# Altium PCB DAP-PCB-REV-2.PcbDoc (part 4 of 4)
Units mil, origin at the board's own origin, x right, y up, seen from the top; angles counter-clockwise.
Board outline 2165.35 x 2165.35 mil, 6 copper layers (Top Layer (Sig), L2 (GND), L3 (Sig), L4 (Sig), L5 (GND), Bottom Layer (Sig)), stack 34.252 mil thick; 270 components, 172 nets, 891 pads, 299 vias.
Unrouted connection lines stored in the file: 138.
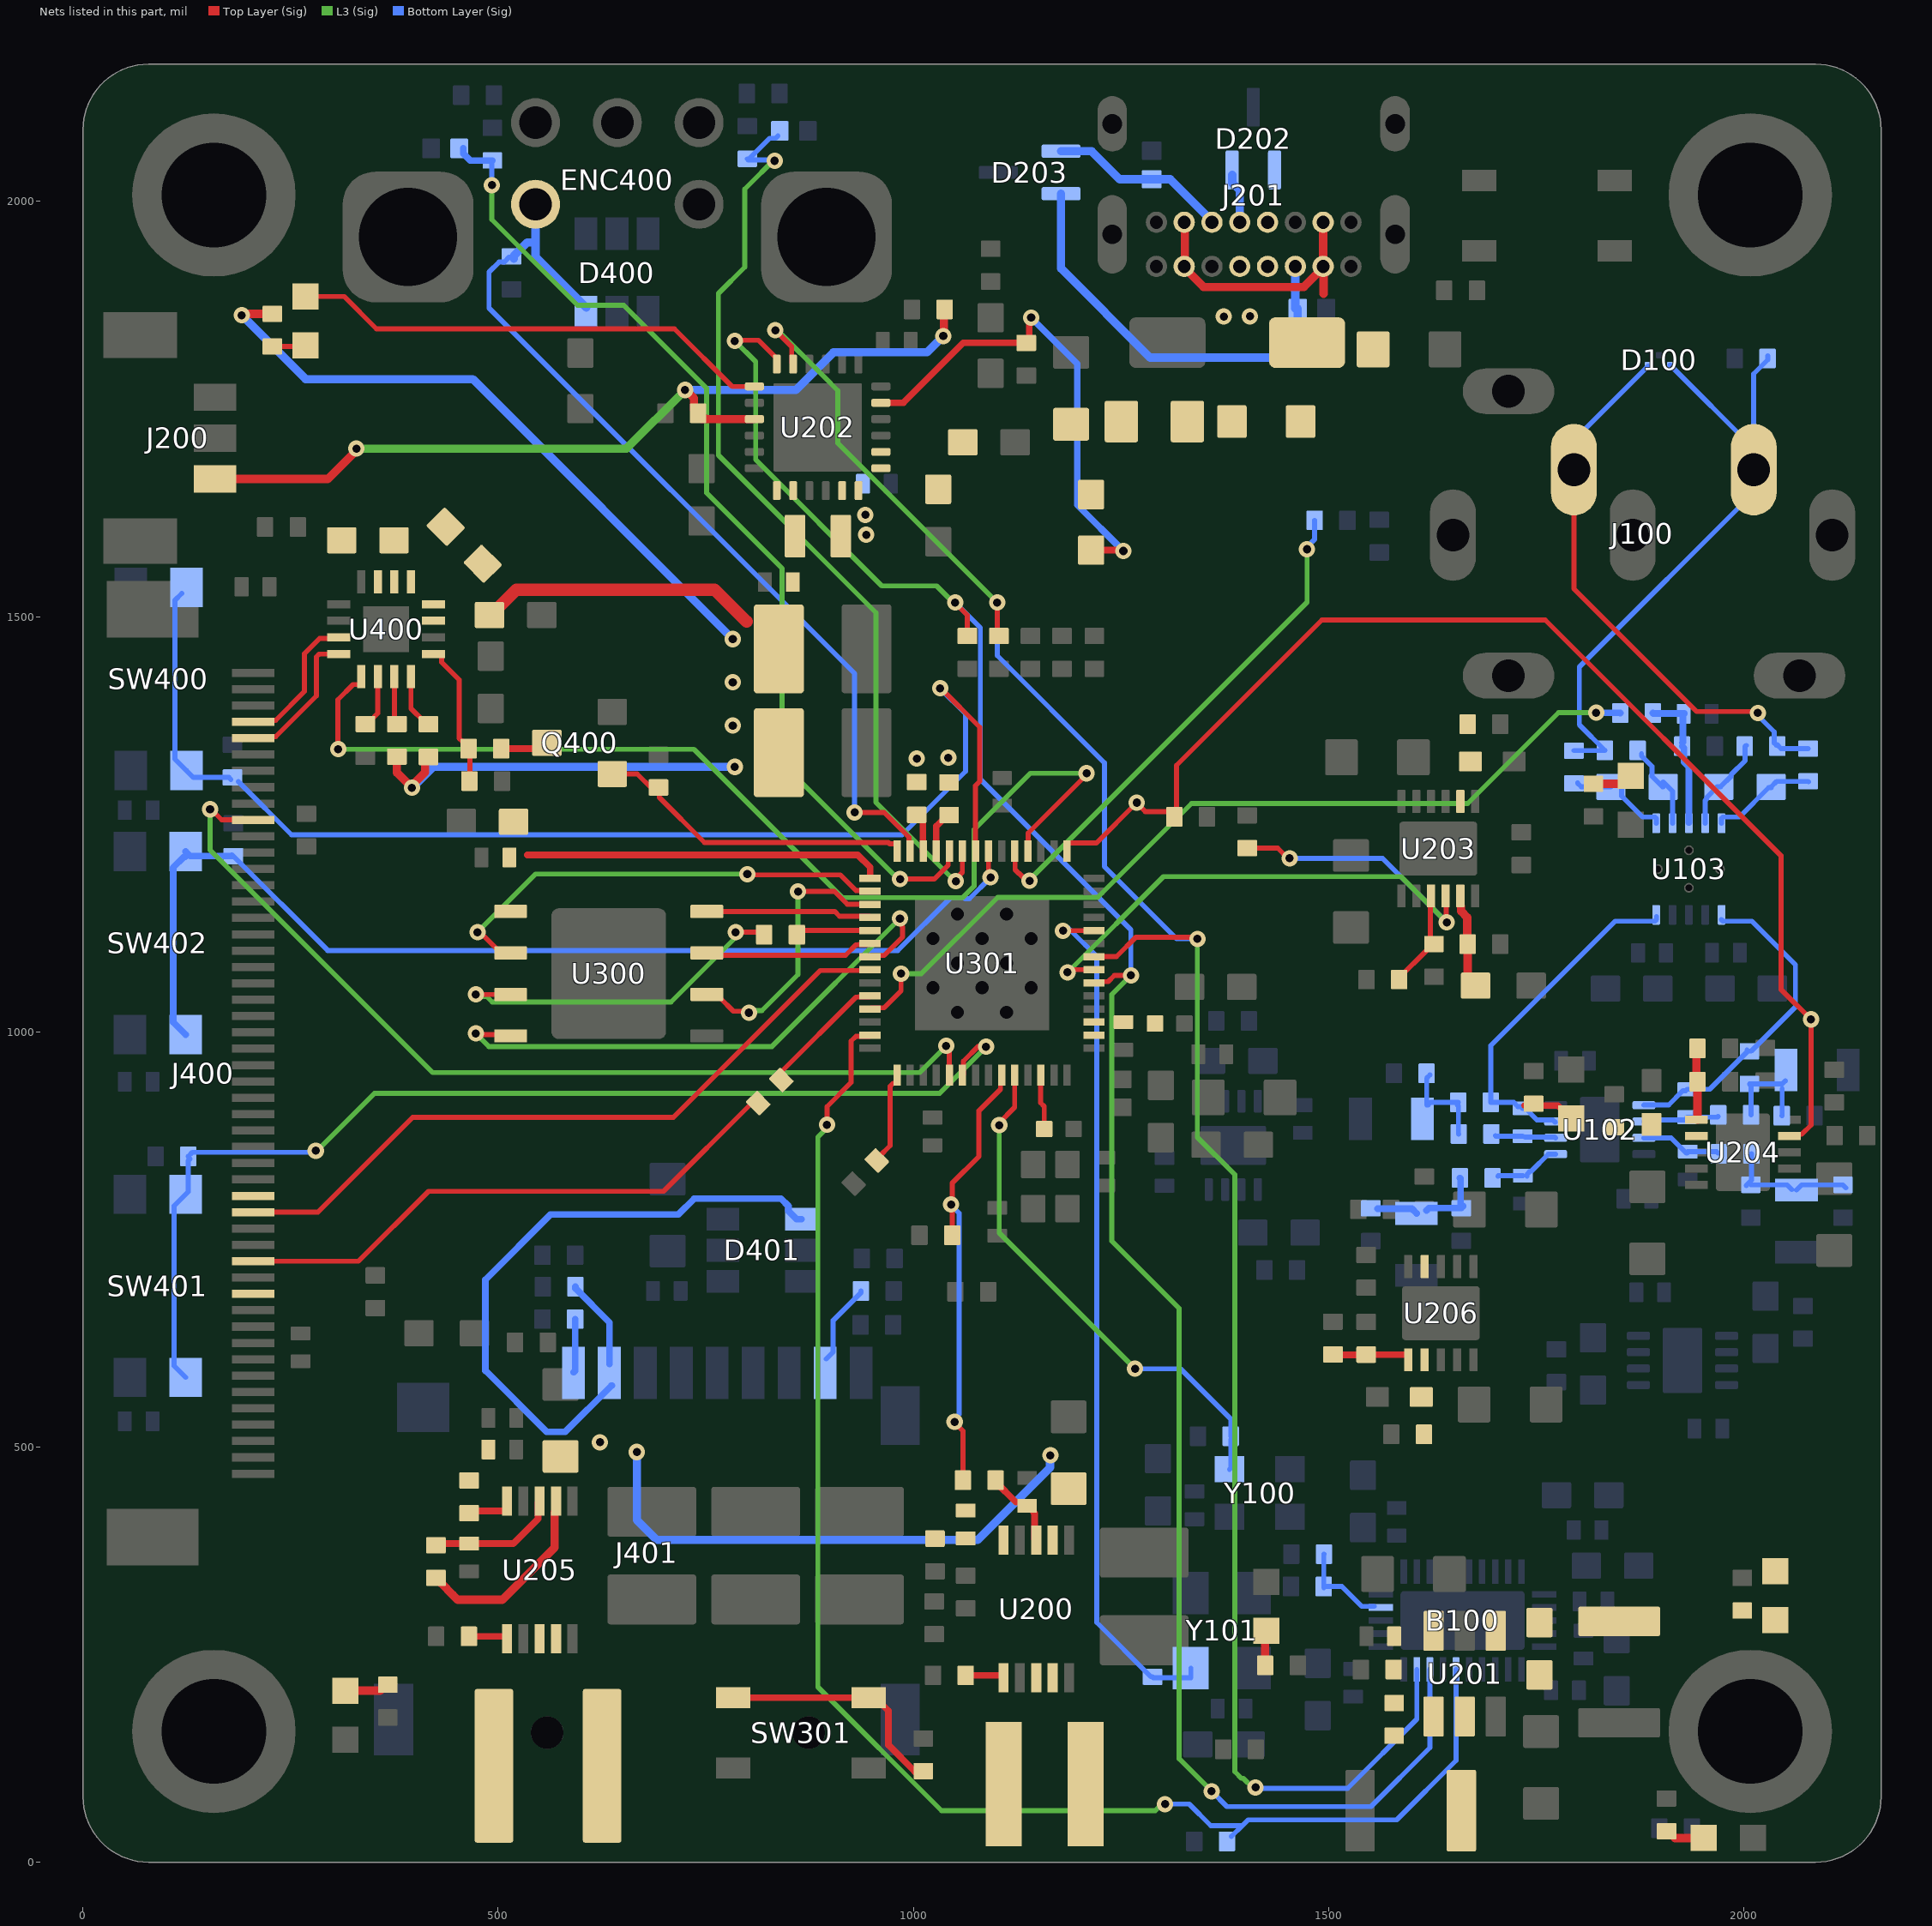
[diagram p7: the nets of this part, all layers, seen from the top]

## Via types
v1: diameter 19.68, hole 9.84, Top Layer (Sig) to Bottom Layer (Sig), tented both sides, 287 vias
v2: diameter 49.21, hole 29.53, Top Layer (Sig) to Bottom Layer (Sig), 6 vias
v3: diameter 15.75/15.75/15.75/15.75/15.75/15.75 (per signal layer), hole 7.87, Top Layer (Sig) to Bottom Layer (Sig), tented both sides, 5 vias
v4: diameter 23.62, hole 11.81, Top Layer (Sig) to Bottom Layer (Sig), tented both sides, 1 vias

## Nets (pads, with @x,y where several pads share a name; then routed paths per layer and width w, separated by ;. In a path a pad name is that pad's centre, name@x,y a point inside that pad or via, vN(x,y) a via of type N, cw(c..) or ccw(c..) an arc to the next point about the centre after c; other vN are vias at no path point) (continued)
LED3: J400.4 U400.15 | length 156.3
  Top Layer (Sig) w6: J400.4@221,1372 224.27,1375.27 231.89,1375.27 266.59,1409.97 266.59,1455.46 285,1473.87 306.87,1473.87 U400.15@308,1475
LED4: J400.5 U400.16 | length 151.8
  Top Layer (Sig) w6: J400.5@225,1355 225.58,1355.58 231.89,1355.58 281,1404.69 281,1451.49 284.51,1455 U400.16@308,1455
LEFT_EAR: C138.1 R127.1 U103.7 | length 105.8
  Bottom Layer (Sig) w5.98: R127.1@1877,1335 1877,1332.25 1889.53,1319.72 1889.53,1307.76 1902.28,1295 C138.1@1903.03,1295 ; C138.1@1903,1301 1914.25,1289.75 U103.7@1914.25,1251.12
MISO_LCD: J400.33
MOSI_LCD: J400.34 U301.36 | length 854.8
  Top Layer (Sig) w6: J400.34@205,782.8 282.8,782.8 397,897 711,897 887.8,1073.8 938.37,1073.8 U301.36@939,1074.43
NetC118_2: C118.2 R122.2 U102.2 | length 91
  Bottom Layer (Sig) w5.98: U102.2@1879.76,892 1881.69,893.93 1931.07,893.93 C118.2@1932,893 ; C118.2@1931.76,897.27 1968.27,897.27 R122.2@1969,898
NetC123_2: C123.2 R120.2 U102.6 | length 70.2
  Bottom Layer (Sig) w5.98: R120.2@1701,875 1701.73,874.27 C123.2@1733.76,874.27 ; C123.2@1736.71,873.29 1772.48,873.29 U102.6@1773.46,872.31
NetC124_2: C124.2 R117.1 U103.10 | length 128.9
  Bottom Layer (Sig) w5.98: U103.10@1973.31,1251.12 1973.31,1257.02 1975.04,1258.76 1994.82,1258.76 2030.06,1294 C124.2@2033.03,1294 ; C124.2@2033.03,1295 2039.66,1301.63 2077.37,1301.63 R117.1@2078,1301
NetC127_2: C127.2 R115.1 R116.2 R120.1 | length 110.6
  Bottom Layer (Sig) w5.98: C127.2@1618.13,912 1618.13,944.13 R116.2@1622,948 ; C127.2@1620,912 1623,915 R115.1@1656.07,915 ; R115.1@1655,912 1656.41,910.59 1656.41,877.34 R120.1@1656.76,877
NetC130_2: C130.2 R114.1 R121.2 R122.1 | length 116.8
  Bottom Layer (Sig) w5.98: R114.1@2007,937 2008.68,935.32 R122.1@2008.68,900 R122.1@2008.68,901.97 ; R114.1@2007,937.32 2046.32,937.32 C130.2@2050,941 ; R121.2@2046,899 2046.17,899.17 C130.2@2046.17,931.54
NetC131_2: C131.2 R123.2 R124.1 R126.2 | length 127.9
  Bottom Layer (Sig) w7.99: R123.2@1559,787 1600.35,787 C131.2@1605.95,781.4 ; C131.2@1618,785 1620.68,787.68 R126.2@1659.95,787.68 ; R124.1@1658.26,824 1659.1,823.16 1659.1,792.9 R126.2@1662,790
NetC132_1: C132.1 R124.2 U102.5 | length 77.3
  Bottom Layer (Sig) w5.98: R124.2@1704,826 1704,826.25 1704.48,826.73 C132.1@1733.95,826.73 ; C132.1@1739,826 1739,828.34 1742.76,832.11 1744.08,832.11 1764.6,852.63 U102.5@1773.46,852.63
NetC133_2: C133.2 R108.2 R128.2 U103.8 | length 169.1
  Bottom Layer (Sig) w7.99: R128.2@1890.68,1384 1891.18,1383.5 C133.2@1928.5,1383.5 ; R108.2@1925.85,1344 1928.12,1341.73 1928.12,1324.88 1933.94,1319.06 U103.8@1933.94,1252.06 ; R108.2@1926,1348 1926.83,1348.83 1926.83,1382.02 C133.2@1927.8,1383
NetC136_2: C136.2 R131.2 R132.1 R133.2 | length 155.9
  Bottom Layer (Sig) w5.98: R133.2@2003,815 2009.25,821.25 R132.1@2009.25,853 ; R133.2@2008.57,815.68 2052.32,815.68 C136.2@2058,810 ; C136.2@2063.57,809.4 2069.85,815.68 2119.32,815.68 R131.2@2123,812
NetC137_1: C137.1 R132.2 U102.3 | length 97
  Bottom Layer (Sig) w5.98: U102.3@1879.76,872.31 1912.54,872.31 1930.85,854 C137.1@1932,854 ; C137.1@1932.57,855.73 1967.27,855.73 R132.2@1969,854
NetC138_2: C138.2 R134.1 U103.6 | length 109.1
  Bottom Layer (Sig) w5.98: R134.1@1800,1300 1800,1299.35 1804.35,1295 C138.2@1840.04,1295 ; C138.2@1853,1292 1853,1284.01 1878.25,1258.76 1892.83,1258.76 1894.57,1257.02 U103.6@1894.57,1251.12
NetC201_1: C201.1 L202.1 U201.5
NetC201_2: C201.2 L201.2 U201.1
NetC205_1: C205.1 R201.1 R204.2 U201.3
NetC212_1: C212.1 R213.1
NetC219_2: C219.2 D201.A FB200.1 J201.A4 J201.A9 J201.B4 J201.B9 | length 331
  Top Layer (Sig) w10: J201.A9@1326.14,1920.25 1349.34,1897.06 1470.27,1897.06 1493.46,1920.25 J201.A4@1493.46,1921.85 ; J201.B4@1326.14,1975 1327,1975 J201.A9@1327,1919 ; J201.B9@1493,1974 1493.46,1974 J201.A4@1493.46,1921.85 ; 1494,1889 1494,1921.85 J201.A4@1493.46,1921.85
NetC221_2: C221.2 R227.1
NetC223_1: C223.1 R233.2 U204.7
NetC226_2: C226.2 R238.2
NetC233_1: C233.1 R248.2 U206.7
NetC302_2: C302.2 L300.1 U301.2 U301.3
NetC404_2: C404.2 R400.2 U301.23 | length 1141.1
  Top Layer (Sig) w6: v1(1051,1181.42) 1051,1183.93 1059.06,1191.99 U301.23@1059.06,1217.52
  L3 (Sig) w6: v1@835.85,2053.85 797,2015 797,1921 765.16,1889.16 765.16,1694.46 954.84,1504.77 954.84,1276.39 1049.81,1181.42 v1(1051,1181.42)
  Bottom Layer (Sig) w6: R400.2@800,2051.32 801.16,2050.16 830.84,2050.16 v1@833,2048 ; R400.2@801.97,2051.32 826.84,2076.19 834.19,2076.19 C404.2@837,2079
  other v1: 833,2049
NetC405_2: C405.2 R408.1 U301.24 | length 1232.3
  Top Layer (Sig) w6: v1(984,1184) 1025.31,1184 1041.98,1200.67 1041.98,1216.19 U301.24@1043.31,1217.52
  L3 (Sig) w6: v1@492.34,2021.66 492.34,1978.32 595.63,1875.03 651.03,1875.03 751,1775.06 751,1649 842,1558 842,1323.42 981.42,1184 v1(984,1184)
  Bottom Layer (Sig) w6: v1(492.34,2019.64) 492.34,2047.34 R408.1@494,2049
  Bottom Layer (Sig) w7.99: C405.2@458,2064 458,2057.82 466.5,2049.32 R408.1@493,2049.32
NetC410_1: C410.1 U400.8
NetC410_2: C410.2 U400.9
NetC411_1: C411.1 U400.11
NetC411_2: C411.2 U400.10
NetD200_A: D200.A R206.1 | length 39
  Top Layer (Sig) w6: R206.1@230,1824 231.32,1825.32 266.84,1825.32 D200.A@268,1826.47
NetD203_1: D203.1 J201.B5 R234.2 | length 218.6
  Bottom Layer (Sig) w10: D203.1@1177.8,2060.59 1214.67,2060.59 1248.38,2026.87 1309.33,2026.87 1356.21,1980 J201.B5@1363,1980
NetD203_2: D203.2 J201.A5 R235.2 | length 511.8
  Bottom Layer (Sig) w10: D203.2@1177.8,2009.41 1177.8,1919.2 1285,1812 1431.91,1812 1462.87,1842.96 R235.2@1462.87,1871 ; R235.2@1460,1871 1460,1918 J201.A5@1463,1921
NetD204_A: D204.A R242.1
NetD204_C: D204.C U206.4
NetD205_C: D205.C R249.1 | length 40.2
  Top Layer (Sig) w10: R249.1@1423.63,237 1423.63,276.63 D205.C@1424,277
NetD206_A: D206.A R250.1 | length 46.3
  Top Layer (Sig) w10: R250.1@1909,37 1909.28,37 1917.28,29 D206.A@1952,29
NetD207_A: D207.A R251.1 | length 61.4
  Top Layer (Sig) w7.99: R251.1@1736,911.32 1776.16,911.32 1788,899.47 D207.A@1788,895
NetD208_C: D208.C R252.1 | length 45.5
  Top Layer (Sig) w10: R252.1@1819,1298.69 1853.25,1298.69 1858,1303.43 D208.C@1858,1308
NetD209_A: D209.A R253.1 | length 54.3
  Top Layer (Sig) w10: D209.A@316,206.53 357.87,206.53 365,213.65 R253.1@365,216
NetD401_1: D401.1 J401.2 R416.1 | length 860.5
  Bottom Layer (Sig) w7.99: R416.1@593,693 593,691.03 634,650.03 J401.2@634,600 ; J401.2@637,574 636.45,574 580.61,518.16 558.37,518.16 484.63,591.9 484.63,701.63 562.99,780 716.89,780 736.07,799.18 840.47,799.18 849.56,790.09 849.56,784.19 859.34,774.4 D401.1@865.24,774.4
NetJ401_1: J401.1 R417.1 | length 64.7
  Bottom Layer (Sig) w8: J401.1@591,590 592.69,591.68 R417.1@592.69,654
NetJ401_8: J401.8 R418.1 | length 99.4
  Bottom Layer (Sig) w6: J401.8@895,606 903.43,614.43 903.43,652.46 937,686.03 R418.1@937,688
NetQ400_1: Q400.1 R425.2 U301.28 | length 397.1
  Top Layer (Sig) w6: Q400.1@637.37,1310.6 667.4,1310.6 685.84,1292.16 687.19,1292.16 R425.2@694,1285.35 ; R425.2@693,1294.32 694,1293.32 694,1282.37 748.37,1228 969.83,1228 971.39,1226.45 978.98,1226.45 980.32,1225.12 U301.28@980.32,1217.52
NetQ400_3: Q400.3 R423.1 | length 55.3
  Top Layer (Sig) w8: R423.1@503.69,1341 553,1341 Q400.3@553,1347
NetR119_1: R119.1 U301.19 | length 616
  Top Layer (Sig) w6: U301.19@1122.05,1217.52 1122.47,1217.09 1122.47,1195.21 1126.72,1190.96 1127.18,1190.96 1136.3,1181.84 v1(1140,1181.84)
  L3 (Sig) w6: v1(1140,1181.84) 1140,1183.23 1474.09,1517.32 v1@1474.09,1580.91
  Bottom Layer (Sig) w6: v1@1476,1586 1483.32,1593.32 R119.1@1483.32,1616
  other v1: 1474.09,1581.19
NetR128_1: R128.1 U301.39 | length 1060.5
  Top Layer (Sig) w6: U301.39@947.83,1027.56 949.17,1028.89 964.69,1028.89 985.13,1049.33 v1(985.13,1070)
  L3 (Sig) w6: v1(985.13,1070) 1009.48,1070 1101.48,1162 1222,1162 1335,1275 1667.56,1275 1776.94,1384.38 v1@1823.62,1384.38
  Bottom Layer (Sig) w7.99: v1@1827,1385 1827,1384.85 1827.66,1384.19 1851.12,1384.19 R128.1@1851.32,1384
  other v1: 1822.25,1384.38
NetR203_1: R203.1 R308.2 U301.51 | length 555.2
  Top Layer (Sig) w6: R308.2@1043,761 1043.87,761 1046.69,763.81 1046.69,817.7 1079,850.01 1079,905.02 1104.88,930.9 1104.88,934.52 1104.97,934.61 1104.97,946.5 U301.51@1106.3,947.83 ; v1@1049,530 1059.63,519.37 R203.1@1059.63,460
  Bottom Layer (Sig) w6: v1(1045.42,792.03) 1045.42,791.26 1055,781.67 1055,539.38 1052.3,536.68 1052.3,533.7 v1@1055,531
  other v1: 1049.68,530.36
NetR204_1: R204.1 U201.4
NetR207_2: R207.2 U200.1 | length 48
  Top Layer (Sig) w8: R207.2@1063,225 1109,225 U200.1@1109,223
NetR219_1: R219.1 R226.2 U203.3 | length 116.3
  Top Layer (Sig) w6: R219.1@1585,1063 1585,1064.97 1618.19,1098.16 1618.19,1098.84 1622.35,1103 R226.2@1626,1103 ; R226.2@1623,1107 1622.52,1107.48 1622.52,1162.88 U203.3@1623.29,1163.65
NetR220_1: R220.1 R224.2 U203.5 | length 100.7
  Top Layer (Sig) w10: U203.5@1658.8,1154.87 1658.8,1152.18 1659.52,1151.46 1659.52,1145.25 1667,1137.77 R224.2@1667,1105.56 ; R224.2@1667.47,1105.56 1667.47,1066.31 1672.77,1061 R220.1@1674,1061
NetR222_1: R222.1 R228.2 U204.6 | length 87.1
  Top Layer (Sig) w10: U204.6@1942.9,894.37 1944.24,894.37 1944.32,894.45 R228.2@1944.32,940 ; R228.2@1942.9,940 1942.9,979 R222.1@1944,979
NetR223_1: R223.1 U204.4 U301.15 | length 1517.4
  Top Layer (Sig) w6: U301.15@1185.04,1217.52 1185.04,1225.98 1186.37,1227.32 1220.32,1227.32 v1(1269,1276) 1269,1275.51 1279.36,1265.15 1308.17,1265.15 R223.1@1314.32,1259 ; R223.1@1317,1258 1317,1321 1492,1496 1761,1496 2044.84,1212.16 2044.84,1051.16 v1(2081,1015) 2081,887.77 2069.84,876.61 2057.02,876.61 U204.4@2055.1,874.68
NetR238_1: R238.1 U205.10 | length 58.6
  Top Layer (Sig) w8: R238.1@464,423 510.63,423 U205.10@510.63,434.95
NetR239_2: R239.2 U205.1 | length 48.3
  Top Layer (Sig) w8: R239.2@464.69,272 512,272 U205.1@512,271
NetR243_1: R243.1 R245.2 U206.6 | length 93.5
  Top Layer (Sig) w7.99: R243.1@1508,611 R245.2@1545.32,611 ; R245.2@1545.32,611.21 1595.03,611.21 1595.95,610.29 U206.6@1595.95,605.11
NetR302_2: R302.2 SW301.1 SW301.2 | length 274.9
  Top Layer (Sig) w7.99: SW301.1@783,198 SW301.2@949,198 ; SW301.2@958.26,194 970,182.26 970,141 1001.19,109.81 1001.19,109.53 1005.72,105 R302.2@1006,105
NetR303_2: R303.2 U301.38 | length 154.9
  Top Layer (Sig) w6: R303.2@840.92,941.92 840.76,942.08 840.76,951.75 930.9,1041.89 934.52,1041.89 934.61,1041.98 946.5,1041.98 U301.38@947.83,1043.31
NetR304_1: R304.1 U301.25 | length 52
  Top Layer (Sig) w8: U301.25@1027.56,1217.52 1027.56,1247.53 1035.19,1255.16 1041.03,1261 R304.1@1044,1261
NetR305_2: R305.2 U301.43 | length 109
  Top Layer (Sig) w6: R305.2@958.76,849.76 972,863 972,934.52 975.51,938.04 978.98,938.04 980.32,939.37 U301.43@980.32,947.83
NetR306_1: R306.1 U301.26 | length 42.6
  Top Layer (Sig) w8: R306.1@1009,1259 1011.48,1256.52 1011.48,1217.85 U301.26@1011.81,1217.52
NetR420_2: R420.2 U400.3 | length 56.7
  Top Layer (Sig) w6: U400.3@375,1428 375,1377 R420.2@379,1373
NetR421_2: R421.2 U400.4 | length 66
  Top Layer (Sig) w6: U400.4@395,1428 395,1389.4 410.4,1374 R421.2@416,1374
NetR422_2: R422.2 U400.2 | length 62.1
  Top Layer (Sig) w6: R422.2@345,1370 345,1373.72 355,1383.72 U400.2@355,1428
NetR423_2: R423.2 R424.2 U400.5 | length 166.3
  Top Layer (Sig) w6: U400.5@422,1455 429.9,1455 431.82,1453.08 431.82,1445.18 453,1424 453,1353.33 456.51,1349.81 457.47,1349.81 464.32,1342.97 R423.2@464.32,1341 ; R424.2@466,1301.37 R423.2@466,1331
NetU301_18: U301.18 U400.1 | length 1302.9
  Top Layer (Sig) w6: v1@307,1343.56 307,1400 325.18,1418.18 333.08,1418.18 335,1420.1 U400.1@335,1428 ; U301.18@1137.8,1217.52 1138.32,1218.04 1138.32,1239.32 1210,1311 v1@1210,1313
  L3 (Sig) w6: v1@308,1341 308.63,1340.37 735.63,1340.37 914.43,1161.57 1059.22,1161.57 1073.16,1175.51 1073.16,1243.73 1140.83,1311.4 v1(1208.48,1311.4)
  other v1: 307.21,1340.37
PG_LDO-: R241.1 U203.4 U301.7 | length 870.6
  Top Layer (Sig) w6: v1@1186,1071 1189.8,1074.8 U301.7@1217.52,1074.8 ; R241.1@1402,1221 1402.32,1221.32 1438.67,1221.32 1450.98,1209 v1(1453,1209) ; U203.4@1641.01,1163.65 1641.68,1162.98 1641.68,1132.41 v1(1642.36,1131.74)
  L3 (Sig) w6: v1(1185.65,1071.55) 1301.1,1187 1587.1,1187 v1(1642.36,1131.74)
  Bottom Layer (Sig) w6: v1(1453,1209) 1565.1,1209 v1(1642.36,1131.74)
PMID_BQ: C200.2 U202.20
POWER: R401.2 SW401.1 SW401.3 U301.48 | length 1336
  Top Layer (Sig) w6: U301.48@1059.06,947.83 1060.39,949.17 1060.39,964.69 1078.7,983 v1@1084,983
  L3 (Sig) w6: v1@280.21,855.21 351,926 1031.55,926 v1(1087.59,982.04)
  Bottom Layer (Sig) w6: SW401.3@123.46,583.76 109.53,597.7 109.53,790.3 SW401.1@123.46,804.24 126.69,807.46 126.69,844.68 R401.2@129,847 ; R401.2@126.69,850 131.69,855 v1@275,855
  other v1: 280.28,856.87
RESET: J400.10 U301.47 | length 1149
  Top Layer (Sig) w6: v1(153,1268) 154.12,1268 166.88,1255.24 J400.10@205,1255.24 ; U301.47@1043.31,947.83 v1@1043.31,979.69
  L3 (Sig) w6: v1(153,1268) 153,1219 421,951 1007.55,951 v1(1039.59,983.04)
RESETB_DAC: B100.21 R111.2 U301.41 | length 1824.9
  Top Layer (Sig) w6: v1(896,888) 896,910 925.04,939.04 925.04,988.79 930.9,994.65 934.52,994.65 934.61,994.73 946.5,994.73 U301.41@947.83,996.06
  L3 (Sig) w5.98: v1(896,888) 896,884.29 885,873.29 885,211 1034,62 1291.29,62 1299.29,70 v1(1303,70)
  Bottom Layer (Sig) w5.98: v1(1303,70) 1332.17,70 1358.17,44 1396.04,44 ; R111.2@1383,30.96 1396.04,44 ; B100.21@1653.5,232 1653.5,122.5 1582,51 1403.04,51 1396.04,44
RIGHT_EAR: C124.1 R125.1 U103.9 | length 116.6
  Bottom Layer (Sig) w6: U103.9@1953.62,1251.12 1953.62,1278.58 1955.32,1280.28 1955.32,1282.25 1968.07,1295 1972.01,1295 1984.76,1307.75 1984.76,1309.72 2001.74,1326.7 2001.74,1343.74 R125.1@2003,1345
RING: D100.3 J100.3 R117.2 R125.2 | length 676.2
  Top Layer (Sig) w6: J100.3@1795.46,1677 1795.46,1533.54 1943.24,1385.76 2012.24,1385.76 v1@2016,1382
  Bottom Layer (Sig) w5.98: v1@2015,1383 2036.72,1361.28 2036.72,1347.82 R125.2@2039.27,1345.27 ; R125.2@2040,1346 2045,1341 R117.2@2077.54,1341
  Bottom Layer (Sig) w6: J100.3@1795.46,1677 1795.46,1712.46 D100.3@1885,1802
  other v1: 2017,1384
SCL_BQ: B100.23 R208.1 U202.6 U301.6 | length 2586.7
  Top Layer (Sig) w6: v1(785,1832) 786,1833 813.35,1833 835.48,1810.87 U202.6@835.48,1804.18 ; v1@1056,1511 1065,1502 R208.1@1065,1476.69 ; U301.6@1217.52,1059.06 1218.85,1060.39 1230.74,1060.39 1230.83,1060.47 1234.46,1060.47 1241.98,1068 v1(1262,1068)
  L3 (Sig) w6: v1(785,1832) 810,1807 810,1689 962,1537 1027.96,1537 1048,1516.96 v1@1048,1516 ; v1(1262,1068) 1239,1045 1239,748 1320,667 1320,124.64 v1(1359.16,85.48)
  Bottom Layer (Sig) w5.98: v1(1359.16,85.48) 1377.64,67 1551,67 1622.01,138.01 B100.23@1622.01,232
  Bottom Layer (Sig) w6: v1@1052,1515.43 1080.62,1486.8 1080.62,1304.25 1262,1122.87 v1(1262,1068)
  other v1: 1050.43,1517
SCL_LCD: J400.37 R303.1 | length 686.9
  Top Layer (Sig) w6: J400.37@205,723.74 331.74,723.74 416,808 699,808 805.08,914.08 R303.1@813.08,914.08
SDA_BQ: B100.24 R211.1 U202.5 U301.8 | length 2528.7
  Top Layer (Sig) w6: v1(833.78,1844.88) 853.44,1825.22 853.44,1805.91 U202.5@855.17,1804.18 ; v1(1101,1517) 1101,1478.69 R211.1@1103,1476.69 ; U301.8@1217.52,1090.55 1244.55,1090.55 1268,1114 1340,1114 v1(1342,1112)
  L3 (Sig) w6: v1(833.78,1844.88) 836.4,1844.88 892.1,1789.18 909,1772.28 909,1709 v1(1101,1517) ; v1(1342,1112) 1342,873 1387,828 1387,109.03 1394.93,101.1 1397.19,101.1 1408.3,90 v1(1412,90)
  Bottom Layer (Sig) w5.98: v1(1412,90) 1413.03,88.97 1522.97,88.97 1606.26,172.26 B100.24@1606.26,232
  Bottom Layer (Sig) w6: v1(1101,1517) 1101,1453 1230,1324 1230,1199 1317,1112 v1(1342,1112)
SELECT: D400.3 ENC400.5 R412.2 U301.27 | length 1151.3
  Top Layer (Sig) w6: v1(929.24,1264.24) 964.86,1264.24 994.73,1234.37 994.73,1218.85 U301.27@996.06,1217.52
  Bottom Layer (Sig) w5.98: R412.2@513.27,1933.09 507.18,1927 501,1927 489,1915 489,1871.57 929.24,1431.33 v1(929.24,1264.24) ; ENC400.5@541.45,1993.03 ENC400.5@545,1996.57
  Bottom Layer (Sig) w10: R412.2@519,1931 519,1934.72 534.83,1950.55 545,1950.55 ; ENC400.5@545,1996.57 545,1950.55 ; D400.3@606,1872 606,1872.26 545,1933.26 545,1950.55
SET_LDO-: C222.2 R232.2 U203.8
SHDN_BB_3.3: C230.2 R237.2 U205.8 | length 158.4
  Top Layer (Sig) w8: R237.2@425,381.68 427.05,383.73 518.15,383.73 548,413.57 548,432.95 U205.8@550,434.95
SHDN_BB_3.9: C213.2 R203.2 U200.8 | length 99.8
  Top Layer (Sig) w8: R203.2@1099,460 1099,458.03 1123.4,433.63 1136.08,433.63 1144.81,424.9 1144.81,421.4 1146,420.22 1146,389.96 U200.8@1148,387.95
SPI_CS0: U300.1 U301.32 | length 199.6
  Top Layer (Sig) w6: U300.1@751.22,1145 905.23,1145 911.02,1139.21 934.52,1139.21 934.61,1139.13 946.5,1139.13 U301.32@947.83,1137.8
SPI_D: U300.5 U301.35 | length 693.1
  Top Layer (Sig) w6: v1(473,998) 476.7,998 478.2,996.5 508.5,996.5 U300.5@510,995 ; U301.35@947.83,1090.55 949.17,1091.88 964.69,1091.88 987.06,1114.26 987.06,1126.18 986.45,1126.79 986.45,1136.45 v1@987.06,1137.06
  L3 (Sig) w6: v1(473,998) 488.65,982.35 829.64,982.35 984.29,1137 v1@985,1137
  other v1: 983.83,1136.54
SPI_HD: U300.7 U301.30 | length 554.8
  Top Layer (Sig) w6: v1(475,1120) 478.19,1120 503.19,1095 U300.7@509,1095 ; v1(800,1190) 801,1189 912,1189 930.84,1170.16 946.97,1170.16 U301.30@947.83,1169.29
  L3 (Sig) w6: v1(475,1120) 545,1190 v1(800,1190)
SPI_Q: U300.2 U301.34 | length 194.5
  Top Layer (Sig) w6: U300.2@759.16,1092.16 918.17,1092.16 930.9,1104.88 934.52,1104.88 934.61,1104.97 946.5,1104.97 U301.34@947.83,1106.3
SPI_WP: U300.3 U301.31 | length 318.7
  Top Layer (Sig) w6: U300.3@762,1041 767.03,1041 783.16,1024.87 800.13,1024.87 v1(802,1023) ; v1(861,1169) 905,1169 920.46,1153.54 U301.31@947.83,1153.54
  L3 (Sig) w6: v1(802,1023) 804.62,1025.62 817.62,1025.62 861,1069 v1(861,1169)
SPICLK: R307.2 U301.33 | length 90.7
  Top Layer (Sig) w6: R307.2@859.69,1115.97 865.76,1122.05 U301.33@947.83,1122.05
SPICLK_FL: R307.1 U300.6 | length 424.3
  Top Layer (Sig) w6: v1(473,1045) U300.6@507,1045 ; v1(786,1120) 815,1120 R307.1@819,1116
  L3 (Sig) w6: v1(473,1045) 475.62,1042.38 486.46,1042.38 492.84,1036 708,1036 v1@790.64,1118.64
STAT_BQ: D200.C U202.7 | length 585.4
  Top Layer (Sig) w6: D200.C@268,1885.53 314.59,1885.53 353.42,1846.7 712.3,1846.7 781.79,1777.21 U202.7@808.51,1777.21
SUMM_L: C123.1 R115.2 U102.7 U103.5 | length 419.3
  Bottom Layer (Sig) w5.98: C123.1@1732,910 1728.04,910 1723.04,915 R115.2@1695.44,915 1695.44,983.44 1845.24,1133.24 1892.83,1133.24 1895,1135.41 U103.5@1895,1139 ; C123.1@1733.76,907.73 1737.2,907.73 1751,893.93 1770.07,893.93 U102.7@1773,891
SUMM_R: C118.1 R114.2 U102.1 U103.1 | length 390.5
  Bottom Layer (Sig) w5.98: U102.1@1879.76,911.68 1880.07,912 1909.58,912 1926.58,929 C118.1@1930,929 ; C118.1@1931.76,930.73 1959.08,930.73 2004,975.65 R114.2@2004,978 ; U103.1@1973,1135.28 1975.04,1133.24 2009.76,1133.24 2062.24,1080.76 2062.24,1029.95 2008.97,976.68 R114.2@2007,976.68
SW1_BB_3.3: L204.1 U205.3
SW1_BB_3.9: L200.1 U200.3
SW2_BB_3.3: L204.2 U205.4
SW2_BB_3.9: L200.2 U200.4
SW_BQ: C207.1 L203.1 U202.17 U202.18
  other v1: 943.12,1598.69 942.12,1622.69
SYS: C203.2 C208.2 C209.2 C210.2 C224.2 C412.2 L203.2 R206.2 R237.1 R420.1 R421.1 U200.7 U202.13 U202.14 U205.7 U400.7 | length 2485.4
  Top Layer (Sig) w10: v1(191,1863) 192.69,1864.69 R206.2@228,1864.69 ; R420.1@378,1328 378,1312 v1(396,1294) 396,1296.62 412.03,1312.65 412.03,1326.16 414.87,1329 R421.1@416,1329 ; R237.1@425,342.32 426.97,342.32 431.81,337.47 431.81,335.5 445.32,322 445.32,321.86 451.17,316 505,316 568,379 568,421 569,422 569,434.27 U205.7@569.69,434.95
  Top Layer (Sig) w15: C412.2@490,1510 499.47,1510 521.72,1532.25 760.75,1532.25 799,1494
  Bottom Layer (Sig) w10: v1@191.07,1862.93 268,1786 469.44,1786 v1(782.44,1473) ; v1@398,1295 422.15,1319.15 v1(784.91,1319.15) ; v1(667,494) 667,412 691,388 1077.33,388 1164.6,475.27 1164.6,489.6 v1(1165,490)
  other v1: 622.45,505.67 782.44,1368.79 782.44,1420.89
TE: J400.39
TIP: D100.2 J100.2 R127.2 R129.2 R134.2 | length 762.8
  Bottom Layer (Sig) w6: R134.2@1795.54,1338.69 1830.68,1338.69 R127.2@1831,1339 ; R127.2@1832.85,1339 1802,1369.85 1802,1439.44 2015,1652.44 J100.2@2015,1653 ; D100.2@1911,1803 1911.48,1803 2012,1702.48 J100.2@2012,1677 2012,1792.35 2029,1809.35 R129.2@2029,1814
TRI_STATE_22: R106.2 U301.52 Y100.1 | length 629.6
  Top Layer (Sig) w6: v1(1103.37,887.6) 1103.37,890.37 1122.05,909.05 U301.52@1122.05,947.83
  L3 (Sig) w6: v1(1103.37,887.6) 1103.37,757.86 1266,595.24 v1@1266,595
  Bottom Layer (Sig) w6: v1@1267,591 1270.21,594.21 1321.79,594.21 1382.19,533.81 R106.2@1382.19,513 ; Y100.1@1380.67,473.09 1382.19,474.61 1382.19,509.19 R106.2@1384,511
  other v1: 1267.02,594.21
TRI_STATE_24: R107.2 U301.10 Y101.1 | length 1048.6
  Top Layer (Sig) w6: v1(1180.23,1121.71) 1180.4,1121.88 1217.35,1121.88 U301.10@1217.52,1122.05
  Bottom Layer (Sig) w6: v1(1180.23,1121.71) 1181.28,1122.76 v1@1188.85,1122.76 ; v1@1186.31,1125.31 v1@1188.85,1122.76 ; R107.2@1288,223.32 1286.03,223.32 1220.73,288.62 1220.73,1090.88 v1@1188.85,1122.76 ; R107.2@1289,222 1334.11,222 Y101.1@1334.11,233.72
TS: J200.3 R214.1 R215.2 U202.9 | length 1078.2
  Top Layer (Sig) w10: J200.3@159.07,1665.79 294.79,1665.79 v1@329,1700 ; v1@729.99,1769.01 735.84,1763.16 735.84,1749.84 R215.2@740.69,1745 ; R215.2@740.69,1743.03 745.53,1738.19 751.04,1738.19 751.39,1737.84 U202.9@808.51,1737.84 ; v1(1036,1838) 1036.84,1838.84 1036.84,1869.16 R214.1@1037.69,1870
  L3 (Sig) w10: v1(329.13,1702.42) 654.42,1702.42 v1(725,1773)
  Bottom Layer (Sig) w10: v1(725,1773) 858.28,1773 903.71,1818.43 1016.43,1818.43 v1(1036,1838)
USB_D_N: D202.1 J201.A7 J201.B7 R304.2 | length 0.9
  Top Layer (Sig) w10: R304.2@1042.38,1300.99 R304.2@1043,1300.37
  other v1: 1042,1330 1373.73,1861.49
USB_D_P: D202.2 J201.A6 J201.B6 R306.2 | length 66.6
  Top Layer (Sig) w10: J201.B6@1393,1976 J201.B6@1396.02,1972.98 ; J201.A6@1426.54,1921.85 J201.A6@1426.54,1923.45
  Bottom Layer (Sig) w10: D202.2@1384,2032 1384,2022.27 1393.07,2013.2 J201.B6@1393.07,1975
  other v1: 1004,1329 1405.27,1861.73
VC_BB_3.9: C212.2 U200.10
VDD_SPI: C311.2 C312.2 U300.8 U301.29 | length 432
  Top Layer (Sig) w7.99: 535.1,1213 933,1213 947.83,1198.17 U301.29@947.83,1185.04
VDPM_BQ: R202.1 R205.2 U202.23 | length 593.9
  Top Layer (Sig) w8: U202.23@960.87,1757.53 987.85,1757.53 1060.01,1829.69 R205.2@1136,1829.69 1139.62,1833.31 1139.62,1854.71 1139.91,1855 v1@1142,1855 ; R202.1@1214,1580.07 1249.93,1580.07 v1@1251,1579
  Bottom Layer (Sig) w8: v1@1145,1856 1145.29,1856.29 1145.67,1856.29 1197.36,1804.61 1197.36,1634.61 v1(1252.86,1579.11)
  other v1: 1141.86,1860.11
VOLUME+: R404.2 SW400.1 SW400.3 U301.22 | length 1546.3
  Top Layer (Sig) w6: v1(1032.16,1413.74) 1033.26,1413.74 1080,1367 1080,1301.59 1074.8,1296.39 U301.22@1074.8,1217.52
  Bottom Layer (Sig) w6: SW400.1@119,1528 110.53,1519.53 110.53,1328.7 SW400.3@124.46,1314.76 132.91,1306.32 175.69,1306.32 R404.2@178,1304 ; R404.2@187,1301.28 188.81,1299.47 251.13,1237.16 986.42,1237.16 1062.84,1313.58 1062.84,1383.05 v1(1032.16,1413.74)
VOLUME-: R406.2 SW402.1 SW402.3 U301.21 | length 1314
  Top Layer (Sig) w6: U301.21@1090.55,1217.52 1090.55,1188.45 v1(1093,1186)
  Bottom Layer (Sig) w6: R406.2@181,1211.63 294.63,1098 981.36,1098 1044.93,1161.57 1061.37,1161.57 1062.49,1160.46 1067.46,1160.46 v1(1093,1186)
  Bottom Layer (Sig) w7.99: SW402.1@123,1211 121.92,1211 108.53,1197.61 108.53,1011.7 SW402.3@123.46,996.76 ; SW402.1@123.46,1217.24 129.07,1211.63 178.63,1211.63 R406.2@179,1212
VUSB: C202.2 FB200.2 R202.2 R227.2 U202.19
XI: B100.29 R104.2 R105.1 | length 111.2
  Bottom Layer (Sig) w5.98: R105.1@1494.19,332 1516.02,332 1540.02,308 B100.29@1555,308 ; R105.1@1494.35,330.65 1494.35,370.84 R104.2@1494.5,371
XTAL_P: L301.2 U301.54 | length 54.8
  Top Layer (Sig) w6: U301.54@1153.12,936 1153.12,914.65 1157.57,910.2 L301.2@1157.57,883
pads on no net: B100.4 B100.5 B100.6 B100.7 B100.26 B100.28 D400.6 ENC400.6 ENC400.7 J100.5 J201.A8 J201.B8 J400.44 J400.45 J400.46 J400.47 J400.S1 J400.S2 J401. U203.7 U301.1 U301.49 U301.50
copper on no net:
  other v2: 35.87,694 144.13,694 35.87,1107 144.13,1107 36.87,1425 145.13,1425

## Polygon pours and split planes (outlines as drawn)
GND on Top Layer (Sig) "GND_L01_P087" (solid, pour order 87): 771,1003 771,988 674,988 674,1003
VDD_SPI on Top Layer (Sig) "VDD_SPI_L01_P069" (solid, pour order 69): 496,1138 496,1273 537,1273 537,1138 511,1138
VUSB on Top Layer (Sig) "Top Layer (Sig)-VUSB" (solid, pour order 85): 950,1679 1003,1626 1347,1626 1347,1690.55 1417.65,1690.55 1417.65,1772.55 1296.65,1772.55 1296.65,1690.55 1297,1690.55 1297,1682 950,1682
-3V9 on Top Layer (Sig) "-3V9_L01_P029" (solid, pour order 29): 1613,13 1613,122 1554,122 1554,283 1584,313 1584,372 1511,372 1511,13
+3V3_DIG on Top Layer (Sig) "+3V3_DIG_L01_P077" (solid, pour order 77): 178,1319 178,1290 256,1290 256,1319 185,1319
+3V9 on Top Layer (Sig) "+3V9_L01_P066" (solid, pour order 66): 2041,843 2086,843 2115,843 2138,866 2138,892 2160,892 2160,802 2041,802
+3V3_DIG on Top Layer (Sig) "+3V3_DIG_L01_P071" (solid, pour order 71): 1313,1021 1355,1021 1355,958 1362,958 1378,942 1378,845 1328,845 1328,995 1313,995
FB_BB_3.9 on Top Layer (Sig) "FB_BB_3.9_L01_P080" (solid, pour order 80): 1012,362 1012,303 1039,303 1039,316 1055,332 1082,332 1082,362
+3V3_DIG on Top Layer (Sig) "+3V3_DIG_L01_P078" (solid, pour order 78): 180,670 180,621 309,621 309,670 182,670
LDO_BQ on Top Layer (Sig) "LDO_BQ_L01_P076" (solid, pour order 76): 950,1773 950,1846 991,1887 1012,1887 1012,1853 988,1853 977,1842 977,1773
+3V3_DIG on Top Layer (Sig) "+3V3_DIG_L01_P074" (solid, pour order 74): 1102,1205 1102,1251 1093,1260 1093,1284 1120,1284 1120,1262 1111,1253 1111,1205 1103,1205
+3V3_DIG on Top Layer (Sig) "+3V3_DIG_L01_P073" (solid, pour order 73): 1282,961 1282,990 1315,990 1315,917 1278,917 1265,930 1165,930 1165,961
+3V3_DIG on Top Layer (Sig) "+3V3_DIG_L01_P072" (solid, pour order 72): 1023,961 1023,889 1032,889 1032,961
NetC302_2 on Top Layer (Sig) "NETC302_2_L01_P070" (solid, pour order 70): 1205,992 1237,992 1243,998 1302,998 1302,1022 1243,1022 1238,1017 1205,1017
+3V3_DIG on Top Layer (Sig) "+3V3_DIG_L01_P011" (solid, pour order 11): 703,454 703,522 994,522 994,370 583,370 583,454
NetC226_2 on Top Layer (Sig) "NETC226_2_L01_P016" (solid, pour order 16): 454,450 497,450 497,509 453,509 453,451
+3V3_ANALOG on Top Layer (Sig) "+3V3_ANALOG_L01_P063" (solid, pour order 63): 1924,791 1924,765 1958,765 1958,840 1853,840 1853,791
EN_LDO+ on Top Layer (Sig) "EN_LDO+_L01_P065" (solid, pour order 65): 2041,850 2111,850 2131,870 2131,932 2094,932 2094,885 2069,860 2041,860
NetC223_1 on Top Layer (Sig) "NETC223_1_L01_P064" (solid, pour order 64): 1956,870 1827,870 1827,904 1904,904 1928,880 1956,880
+3V9 on Top Layer (Sig) "+3V9_L01_P059" (solid, pour order 59): 1565,848 1565,806 1650,806 1650,704 1689,704 1689,848
-3V3 on Top Layer (Sig) "-3V3_L01_P061" (solid, pour order 61): 1553,1264 1553,1394 1627,1394 1627,1301 1627,1264
SET_LDO- on Top Layer (Sig) "SET_LDO-_L01_P060" (solid, pour order 60): 1654,1264 1654,1388 1686,1388 1686,1316 1664,1294 1664,1264
NetC233_1 on Top Layer (Sig) "NETC233_1_L01_P058" (solid, pour order 58): 1611,619 1611,590 1594,573 1594,497 1630,497 1630,583 1625,583 1620,588 1620,619
+3V3_DAC on Top Layer (Sig) "+3V3_DAC_L01_P057" (solid, pour order 57): 1650,619 1650,530 1695,530 1695,619
VC_BB_3.9 on Top Layer (Sig) "VC_BB_3.9_L01_P023" (solid, pour order 23): 1051,370 1115,370 1115,406 1051,406
-3V9 on Top Layer (Sig) "-3V9_L01_P049" (solid, pour order 49): 1530,1048 1530,1079 1468,1141 1468,1177 1611,1177 1611,1148.71 1551,1048
+3V9 on Top Layer (Sig) "+3V9_L01_P025" (solid, pour order 25): 1689,116 1689,200 1721,200 1735,186 1900,186 1900,116
NetC201_1 on Top Layer (Sig) "NETC201_1_L01_P026" (solid, pour order 26): 1769,208 1678,208 1678,12 1642,12 1642,111 1651,120 1651,244 1769,244
NetC201_2 on Top Layer (Sig) "NETC201_2_L01_P027" (solid, pour order 27): 1899,254 1899,309 1689,309 1689,254
NetR204_1 on Top Layer (Sig) "NETR204_1_L01_P028" (solid, pour order 28): 1567,142 1640,142 1640,201 1612,201 1600,189 1600,162 1567,162
NetC205_1 on Top Layer (Sig) "NETC205_1_L01_P030" (solid, pour order 30): 1592,181 1592,192 1609,209 1639,209 1639,303 1587,303 1561,277 1561,181
+LED on Top Layer (Sig) "+LED_L01_P037" (solid, pour order 37): 209,1582 209,1426 238,1426 238,1582
+LED on Top Layer (Sig) "+LED_L01_P036" (solid, pour order 36): 408,1479 543,1479 543,1433 477,1433 440,1470 408,1470
SYS on Top Layer (Sig) "SYS_L01_P035" (solid, pour order 35): 454,1500 473,1519 508,1519 508,1487 443,1487 440,1490 407,1490 407,1500
NetC410_2 on Top Layer (Sig) "NETC410_2_L01_P034" (solid, pour order 34): 390,1528 400,1528 400,1547 460,1607 459,1607 435,1631 403,1599 403,1569 390,1556
NetC410_1 on Top Layer (Sig) "NETC410_1_L01_P033" (solid, pour order 33): 408,1510 452,1510 504,1562 479,1587 475,1587 408,1520
NetC411_1 on Top Layer (Sig) "NETC411_1_L01_P032" (solid, pour order 32): 350,1528 350,1560 338,1572 290,1572 290,1612 339,1612 339,1585 360,1564 360,1528
NetC411_2 on Top Layer (Sig) "NETC411_2_L01_P031" (solid, pour order 31): 380,1528 380,1560 393,1573 393,1613 348,1613 348,1586 370,1564 370,1528
SYS on Top Layer (Sig) "SYS_L01_P006" (solid, pour order 6): 840,1564 840,1521 763,1521 763,1280 874,1280 874,1622 860,1636 860,1663 831,1663 831,1573
+3V9 on Top Layer (Sig) "+3V9_L01_P021" (solid, pour order 21): 1181,406 1181,311 1377,311 1377,406
NetC212_1 on Top Layer (Sig) "NETC212_1_L01_P024" (solid, pour order 24): 1038,380 1038,404 1049,415 1076,415 1076,435 1014,435 1014,380
SYS on Top Layer (Sig) "SYS_L01_P022" (solid, pour order 22): 1148,506 1148,478 1161.85,478 1161.85,370.08 1173.85,370.08 1173.85,412.08 1175.85,414.08 1221,414.08 1221,506
SW1_BB_3.9 on Top Layer (Sig) "SW1_BB_3.9_L01_P020" (solid, pour order 20): 1154,241 1142,241 1142,198 1118,174 1045,174 1045,12 1142,12 1142,166 1154,178
SW2_BB_3.9 on Top Layer (Sig) "SW2_BB_3.9_L01_P019" (solid, pour order 19): 1161.6,239.49 1173.6,239.49 1173.6,198.49 1199.6,172.49 1270.6,172.49 1270.6,12 1170,12 1170,168.09 1161.6,176.49
SYS on Top Layer (Sig) "SYS_L01_P018" (solid, pour order 18): 564,418 564,458 547,475 547,522 688,522 688,462 578,462 576,460 576,418
FB_BB_3.3 on Top Layer (Sig) "FB_BB_3.3_L01_P017" (solid, pour order 17): 536,659 448,659 448,611 507,611 507,545 511,541 511,476 525,462 525,418 536,417
SW1_BB_3.3 on Top Layer (Sig) "SW1_BB_3.3_L01_P015" (solid, pour order 15): 556.51,287.33 544.51,287.33 544.51,246.33 518.51,220.33 447.51,220.33 447.51,17.33 513.51,17.33 532.51,36.33 532.51,200.33 556.51,224.33
SW2_BB_3.3 on Top Layer (Sig) "SW2_BB_3.3_L01_P014" (solid, pour order 14): 564,286 576,286 576,245 602,219 673,219 673,16 607,16 588,35 588,199 564,223
BAT+ on Top Layer (Sig) "BAT+_L01_P008" (solid, pour order 8): 820,1703 820,1658 722,1658 722,1703
SW_BQ on Top Layer (Sig) "SW_BQ_L01_P007" (solid, pour order 7): 956,1663.21 956,1590.81 929.4,1564.21 895.4,1564.21 895.4,1622.21 909.4,1636.21 909.4,1663.21
PMID_BQ on Top Layer (Sig) "PMID_BQ_L01_P005" (solid, pour order 5): 949,1703 949,1693 1078,1693 1078,1731 1041,1731 1013,1703
NetC221_2 on Top Layer (Sig) "NETC221_2_L01_P002" (solid, pour order 2): 1168.48,1771.45 1168.48,1689.45 1289.48,1689.45 1289.48,1771.45
NetC219_2 on Top Layer (Sig) "NETC219_2_L01_P000" (solid, pour order 0): 1425,1691 1425,1856 1475,1906 1501,1906 1514,1906 1586,1834 1586,1691
GND on Bottom Layer (Sig) "GND_L06_P084" (solid, pour order 84): 78.74,0 cw(c78.74,78.74) 0,78.74 0,2086.61 cw(c78.74,2086.61) 78.74,2165.35 2086.61,2165.35 cw(c2086.61,2084.97) 2167,2084.97 2167,1863 2130.43,1826.43 1662.43,1826.43 1195,1359 1195,-1.01
+3V3_DIG on Bottom Layer (Sig) "+3V3_DIG_L06_P068" (solid, pour order 68): 707,713 635,713 635,752 790,752 790,721 737,721 737,556 707,556
+3V3_ANALOG on Bottom Layer (Sig) "+3V3_ANALOG_L06_P056" (solid, pour order 56): 1408.2,898 1512,898 1512,931 1408.2,931
+3V3_DAC on Bottom Layer (Sig) "+3V3_DAC_L06_P055" (solid, pour order 55): 1499,280 1499,294 1458,294 1458,220 1541.53,220 1540.48,265.48 1546,271 1578,271 1578,280
+3V3_ANALOG on Bottom Layer (Sig) "+3V3_ANALOG_L06_P054" (solid, pour order 54): 1387,259 1387,118 1443,118 1443,259
+3V3_ANALOG on Bottom Layer (Sig) "+3V3_ANALOG_L06_P053" (solid, pour order 53): 1405,390 1245,390 1245,452 1303,452 1328,427 1357,427 1371,441 1405,441
+3V3_DAC on Bottom Layer (Sig) "+3V3_DAC_L06_P045" (solid, pour order 45): 1494,426 1494,405 1519,380 1582,380 1582,336 1595,336 1595,402 1591,406 1572,406 1552,426
+3V3_DAC on Bottom Layer (Sig) "Bottom Layer (Sig)-+3V3_DAC" (solid, pour order 48): 1745,302 1788,302 1817,302 1817,324 1831,338 1831,374 1810,374 1810,461 1748,461 1727,440 1727,336 1782,336 1782,310 1745,310
DVDD on Bottom Layer (Sig) "DVDD_L06_P050" (solid, pour order 50): 1745,193 1777,193 1777,264 1745,264
+3V3_DIG on Bottom Layer (Sig) "+3V3_DIG_L06_P051" (solid, pour order 51): 1745,295 1788,295 1952,295 1952,248 1833,248 1816,265 1800,265 1778,287 1745,287 1745,294
GND on Bottom Layer (Sig) "GND_L06_P052" (solid, pour order 52): 1841,184 1841,150 1893,150 1893,230 1842,230 1816,256 1794,256 1794,184
-3V3 on Bottom Layer (Sig) "-3V3_L06_P044" (solid, pour order 44): 1289,794 1362,794 1362,830 1289,830
-3V3 on Bottom Layer (Sig) "-3V3_L06_P043" (solid, pour order 43): 1958,509 1989,509 1989,579 1958,579
+3V3_ANALOG on Bottom Layer (Sig) "+3V3_ANALOG_L06_P042" (solid, pour order 42): 1859,629 1886,629 1886,699 1859,699
-3V3 on Bottom Layer (Sig) "-3V3_L06_P041" (solid, pour order 41): 1839,755 1839,857 1873,857 1873,755
+3V3_ANALOG on Bottom Layer (Sig) "+3V3_ANALOG_L06_P040" (solid, pour order 40): 1761,907 1761,1011 1789,1011 1789,907 1785,907
+3V3_ANALOG on Bottom Layer (Sig) "+3V3_ANALOG_L06_P039" (solid, pour order 39): 1992.07,1006.55 1992.07,1066.55 1974.07,1084.55 1974.07,1114.55 1959.07,1129.55 1959.07,1151.55 1950.07,1151.55 1950.07,1006.55
-3V3 on Bottom Layer (Sig) "-3V3_L06_P038" (solid, pour order 38): 1877,1007 1877,1067 1895,1085 1895,1115 1910,1130 1910,1152 1919,1152 1919,1007
BOOT_BQ on Bottom Layer (Sig) "BOOT_BQ_L06_P010" (solid, pour order 10): 962,1647 962,1701 1008,1747 1038,1747 1038,1705 980,1647
SW_BQ on Bottom Layer (Sig) "SW_BQ_L06_P009" (solid, pour order 9): 920,1677 920,1587 954,1587 954,1677
SYS on L4 (Sig) "SYS_L04_P086" (solid, pour order 86): 683,475 592,475 517,550 517,654 539,676 539,1347 692,1500 843,1500 843,1387 843,1322 817,1296 817,705 817,609
-3V3 on L4 (Sig) "-3V3_L04_P062" (solid, pour order 62): 1885,1161 1982,1161 1982,1231 1885,1231
GND on L2 (GND) "GND_L02_P067" (solid, pour order 67): 0,78.74 ccw(c78.74,78.74) 78.74,0 2086.61,0 ccw(c2086.61,78.74) 2165.35,78.74 2165.35,2086.61 ccw(c2086.61,2086.61) 2086.61,2165.35 78.74,2165.35 ccw(c78.74,2086.61) 0,2086.61
GND on L5 (GND) "GND_L05_P079" (solid, pour order 79): 0,78.74 ccw(c78.74,78.74) 78.74,0 2086.61,0 ccw(c2086.61,78.74) 2165.35,78.74 2165.35,2086.61 ccw(c2086.61,2086.61) 2086.61,2165.35 78.74,2165.35 ccw(c78.74,2086.61) 0,2086.61
GND on L3 (Sig) "GND_L03_P082" (solid, pour order 82): 0,78.74 ccw(c78.74,78.74) 78.74,0 2086.61,0 ccw(c2086.61,78.74) 2165.35,78.74 2165.35,2086.61 ccw(c2086.61,2086.61) 2086.61,2165.35 78.74,2165.35 ccw(c78.74,2086.61) 0,2086.61

## Silkscreen, mask and mechanical layers (free items; w line width, h text height)
Top Overlay:
  drawing of 22 lines, arcs and shapes, not listed
  text "BQ STAT" at 318.26,1805.54 h13.78
  text "DIGITAL AUDIO PLAYER" at 1282.8,1670.68 h18.37
  text "ALEXANDER LOKER" at 1317.29,1643.68 h18.37
  text "-3V3 STAT" at 1829.26,1189.26 h13.78
  text "+3V3 STAT" at 1564.94,945.01 h13.78
  text "3V3_DAC STAT" at 1938.26,418.85 h13.78
  text "+3V9 STAT" at 1383.26,385.26 h13.78
  text "3V3 DIG STAT" at 223.26,287.26 h13.78
  text "-3V9" at 2069.26,27.26 h13.78
Bottom Overlay:
  drawing of 342 lines, arcs and shapes, not listed
Mechanical 1:
  the board outline again, w10

## Text inside footprints (layer, text, board x,y; h text height)
J201: Mechanical 13 "PCB EDGE" at 1200.55,2155.31 h32 r180